# Altium PCB CH32V307RCT6-SIZE-I.PcbDoc
Units mm, origin at the board's own origin, x right, y up, seen from the top; angles counter-clockwise.
Board outline 65.41 x 44.7 mm, 2 copper layers (Top Layer, Bottom Layer), stack 0.325 mm thick; 2 components, 0 nets, 52 pads, 0 vias.
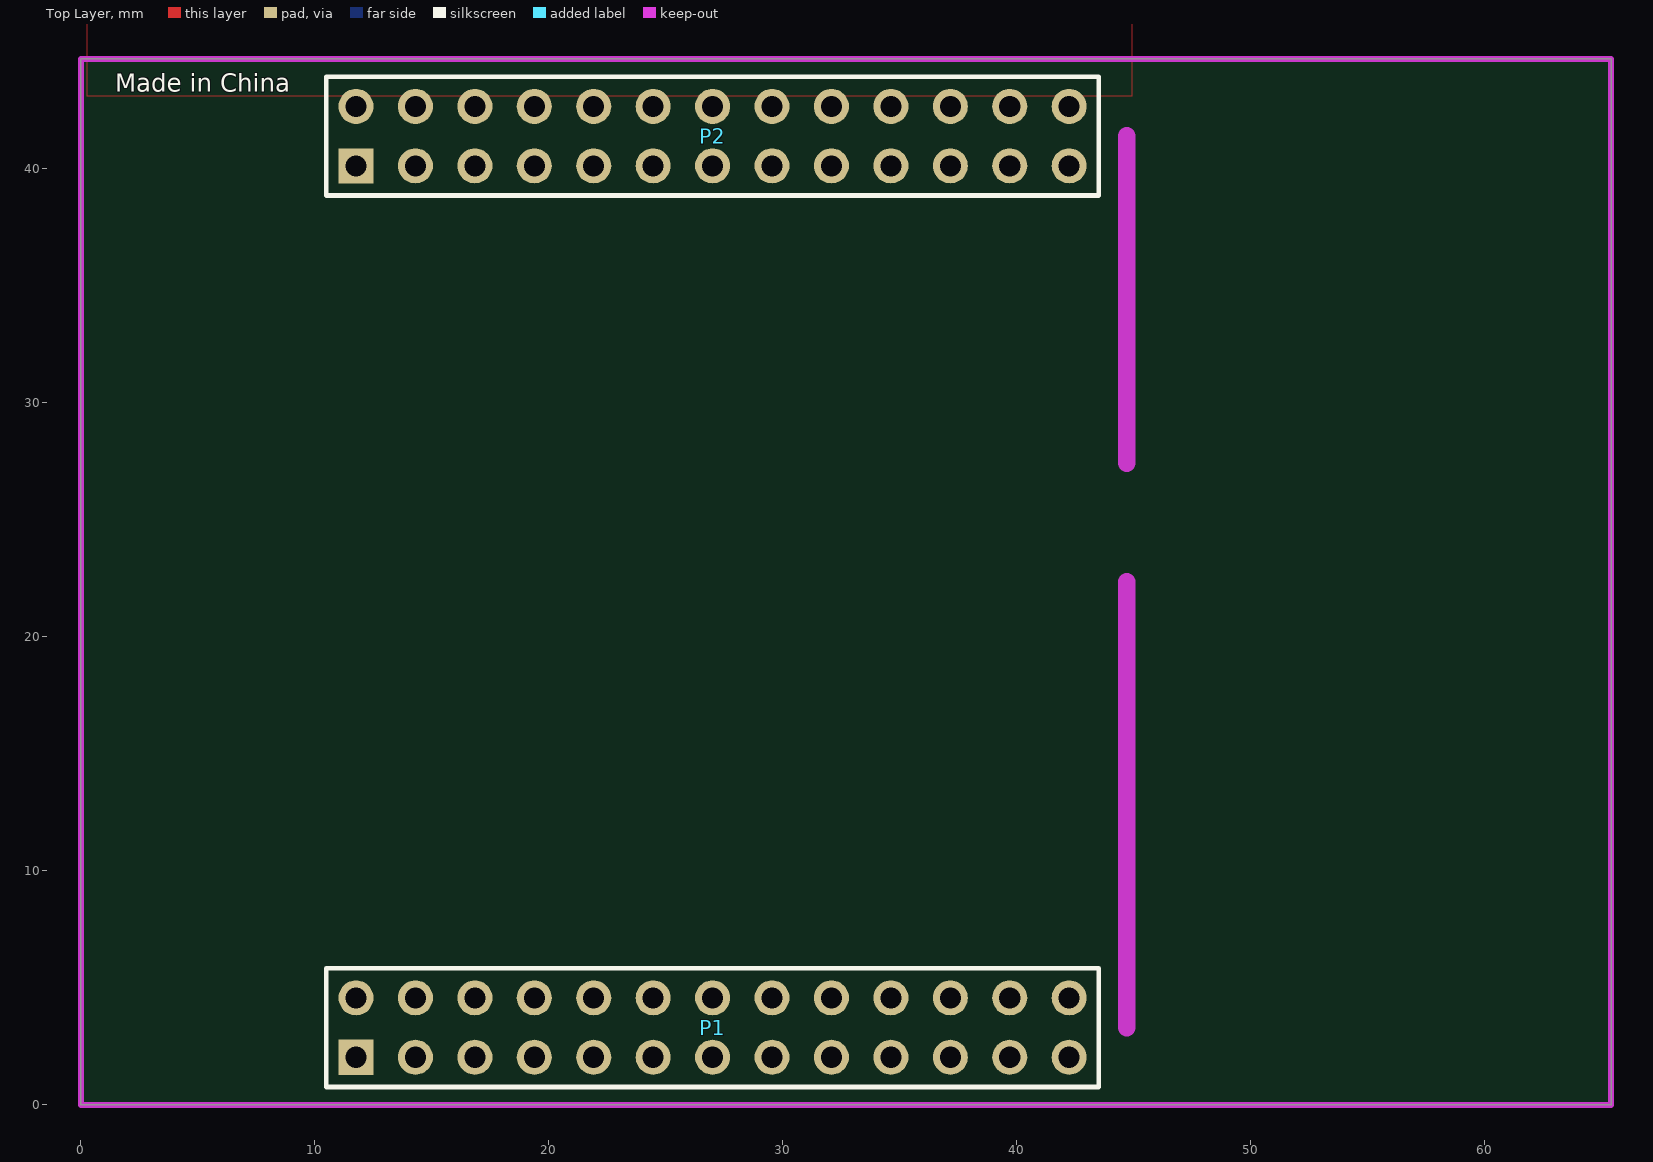
[diagram p0: Top Layer view]
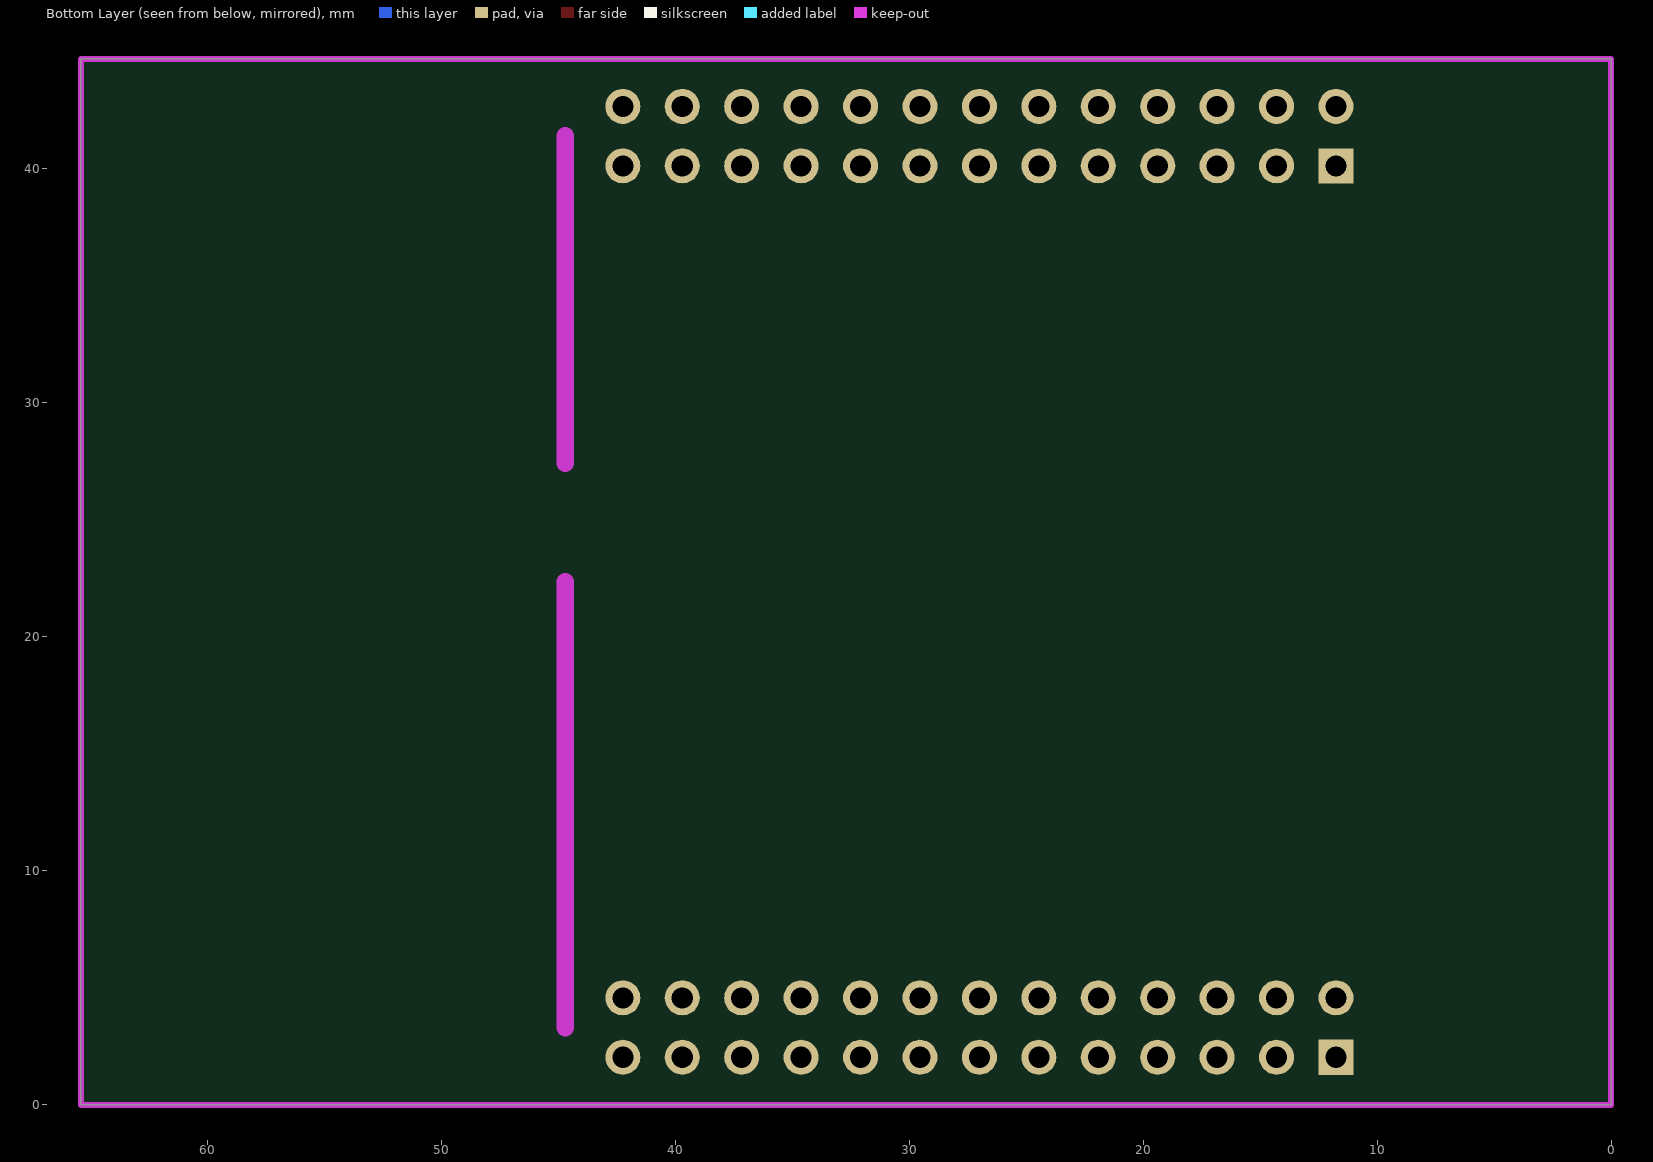
[diagram p1: Bottom Layer view, seen from below]

## Layer stack, top to bottom
Top Solder: solder mask 0.0102, Solder Resist, Dk 3.5
Top Layer: signal copper 0.0356
Dielectric 1: core 0.254, FR-4, Dk 4.2
Bottom Layer: signal copper 0.0356
Bottom Solder: solder mask 0.0102, Solder Resist, Dk 3.5

## Board outline
65.405,44.704 65.405,0 0,0 0,44.704

## Design rules (kind name [scope] priority, off if disabled: settings)
Clearance [All] p1: gap=0.152 ignorepadtopadclearanceinfootprint=TRUE
DiffPairsRouting [All] p1: maxlimit=0.254 minlimit=0.254 mostfreqgap=0.254 substack1={B898CEC4-6A1F-4D15-81D9-7673833C01F6} toplayer_{b898cec4-6a1f-4d15-81d9-7673833c01f6}_minwidth=0.381 toplayer_{b898cec4-6a1f-4d15-81d9-7673833c01f6}_maxwidth=0.381 toplayer_{b898cec4-6a1f-4d15-81d9-7673833c01f6}_prefwidth=0.381 bottomlayer_{b898cec4-6a1f-4d15-81d9-7673833c01f6}_minwidth=0.381 bottomlayer_{b898cec4-6a1f-4d15-81d9-7673833c01f6}_maxwidth=0.381 bottomlayer_{b898cec4-6a1f-4d15-81d9-7673833c01f6}_prefwidth=0.381 toplayer_minwidth=0.381 toplayer_maxwidth=0.381 toplayer_prefwidth=0.381 bottomlayer_minwidth=0.381 bottomlayer_maxwidth=0.381 bottomlayer_prefwidth=0.381 maxuncoupledlength=12.7
HoleToHoleClearance [All] p1: gap=0 allowstackedmicrovias=TRUE
Length "InNet('FMC_A3') Or InNet('FMC_A1')" [InNet('FMC_A3') Or InNet('FMC_A1')] p1: maxlimit=53.057 minlimit=50.8
MinimumSolderMaskSliver [All] p1: minsoldermaskwidth=0
PolygonConnect [(InPadClass('All Pads'))] p1: connectstyle=Relief reliefconductorwidth=0.508 reliefentries=4 polygonreliefangle="90 Angle" airgapwidth=0.254
PolygonConnect PolygonConnect_1 [All] p2: connectstyle=Direct reliefconductorwidth=0.254 reliefentries=4 polygonreliefangle="90 Angle" airgapwidth=0.254
RoutingVias [All] p1: holewidth=0.711 width=1.27 viastyle="Through Hole" minholewidth=0.711 minwidth=1.27 maxholewidth=0.711 maxwidth=1.27
SilkToSilkClearance [All] p1: silktosilkclearance=0
SilkToSolderMaskClearance [IsPad] p1: minsilkscreentomaskgap=0 clearancetoexposedcopper=TRUE
SolderMaskExpansion [All] p1: expansion=0.102 istentingtop=FALSE
Width [All] p1: maxlimit=1.27 minlimit=0.178 preferedwidth=0.254
25 further rules are at their usual default settings.

## Components (designator, comment, footprint, x,y, rotation, side; value= is the part's Value field where it differs from the comment)
P1 "MHDR2X13" HDR2X13 11.76,2.032 r0 top locked
P2 "MHDR2X13" HDR2X13 11.76,40.132 r0 top locked

## Footprints (in the part's own frame and the unit in brackets; to place one, negate y for a bottom-side part, rotate by r counter-clockwise, add the part's x,y. Pads: shape width x height; smd on the part's side, far side on the other; paste and mask are expansions set on the pad)
HDR2X13 [mm] "Connector; Header; 13x2 Position"
  rect 1.5x1.5 hole 0.9: 1(0,0)
  round 1.5 hole 0.9: 2(0,2.54) 3(2.54,0) 4(2.54,2.54) 5(5.08,0) 6(5.08,2.54) 7(7.62,0) 8(7.62,2.54) 9(10.16,0) 10(10.16,2.54) 11(12.7,0) 12(12.7,2.54) 13(15.24,0) 14(15.24,2.54) 15(17.78,0) 16(17.78,2.54) 17(20.32,0) 18(20.32,2.54) 19(22.86,0) 20(22.86,2.54) 21(25.4,0) 22(25.4,2.54) 23(27.94,0) 24(27.94,2.54) 25(30.48,0) 26(30.48,2.54)
  silkscreen extent -1.27,-1.27 31.75,3.81

## Part data
P1 P2: "Header, 13-Pin, Dual row", LatestRevisionDate=17-Jul-2002, LatestRevisionNote="Re-released for DXP Platform.", Publisher="Altium Limited"

## Nets (pads, with @x,y where several pads share a name; then routed paths per layer and width w, separated by ;. In a path a pad name is that pad's centre, name@x,y a point inside that pad or via, vN(x,y) a via of type N, cw(c..) or ccw(c..) an arc to the next point about the centre after c; other vN are vias at no path point)
pads on no net: P1.1 P1.2 P1.3 P1.4 P1.5 P1.6 P1.7 P1.8 P1.9 P1.10 P1.11 P1.12 P1.13 P1.14 P1.15 P1.16 P1.17 P1.18 P1.19 P1.20 P1.21 P1.22 P1.23 P1.24 P1.25 P1.26 P2.1 P2.2 P2.3 P2.4 P2.5 P2.6 P2.7 P2.8 P2.9 P2.10 P2.11 P2.12 P2.13 P2.14 P2.15 P2.16 P2.17 P2.18 P2.19 P2.20 P2.21 P2.22 P2.23 P2.24 P2.25 P2.26

## Polygon pours and split planes (outlines as drawn)
no net on Top Layer "GND_L01_P000" (solid, shelved, pour order 0): 44.907,87.818 44.907,43.114 0.279,43.114 0.279,87.818

## Keep-outs
Keep-Out Layer:
  lines w0.254: 0,0 44.704,0 65.405,0 65.405,44.704 44.704,44.704 0,44.704 0,0
  lines w0.762: 44.704,3.302 44.704,22.352 ; 44.704,27.432 44.704,41.402

## Silkscreen, mask and mechanical layers (free items; w line width, h text height)
Top Overlay:
  text "Made in China" at 1.473,43.307 h0.76

## Dimensions
42.24,2.032 to 44.704,3.302 on Top Overlay
0,0 to 11.76,2.032 on Top Overlay
44.704,41.402 to 65.405,44.704 on Top Overlay
11.76,2.032 to 11.76,42.672 on Top Overlay
11.76,40.132 to 11.76,4.572 on Top Overlay
0,44.704 to 0,0 on Top Overlay
0,44.704 to 44.704,41.402 on Top Overlay
0,44.704 to 65.405,44.704 on Top Overlay